# Altium PCB PCB1.PcbDoc
Units mm, origin at the board's own origin, x right, y up, seen from the top; angles counter-clockwise.
Board outline 50 x 30 mm, 2 copper layers (Top Layer, Bottom Layer); 71 components, 46 nets, 205 pads, 0 vias.
Unrouted connection lines stored in the file: 119.
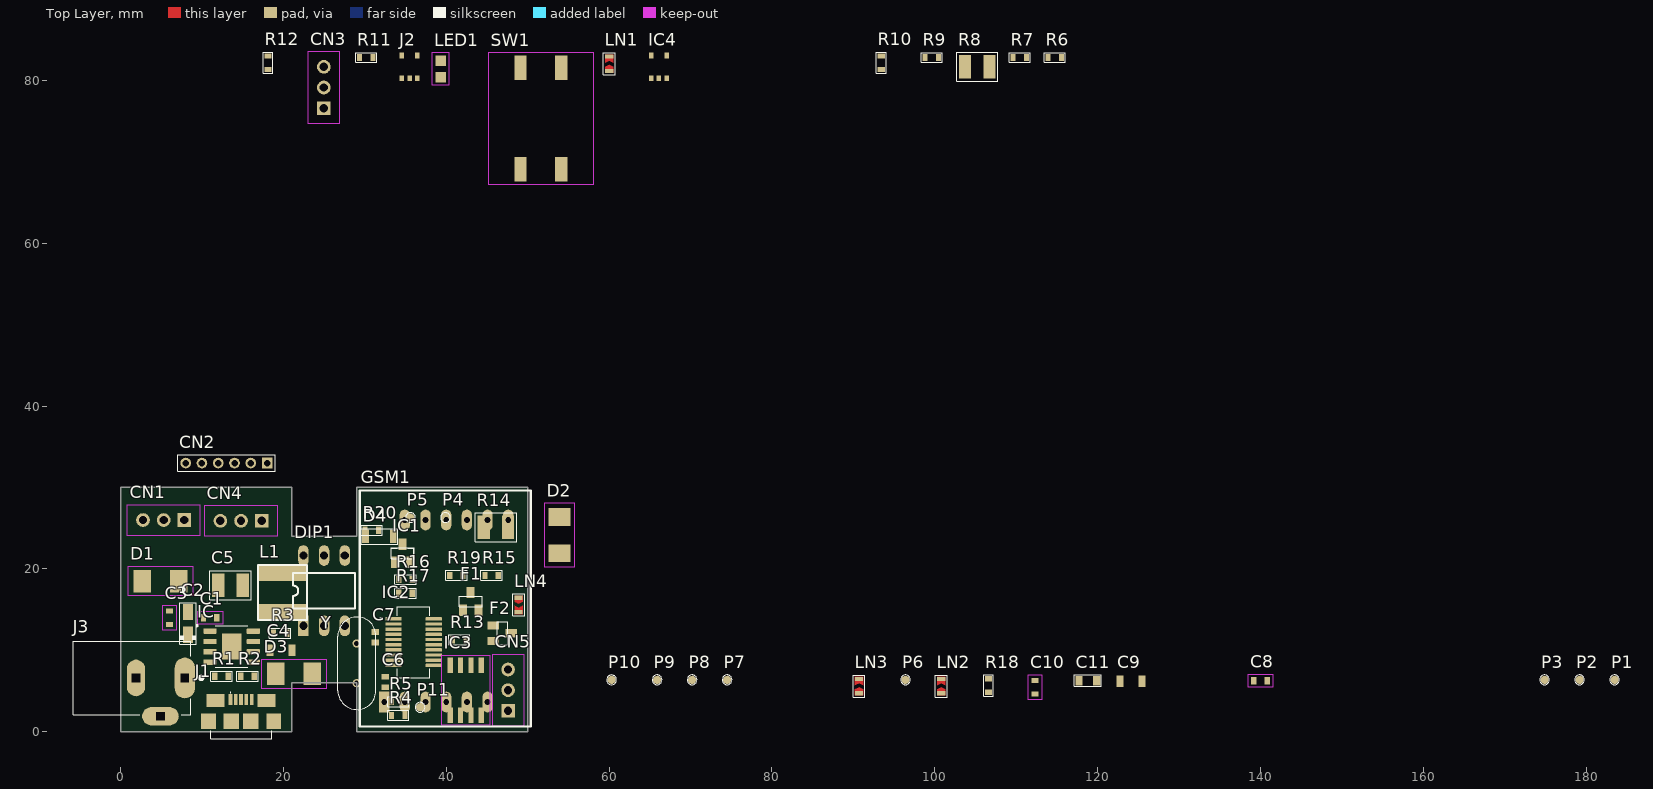
[diagram p0: Top Layer view]
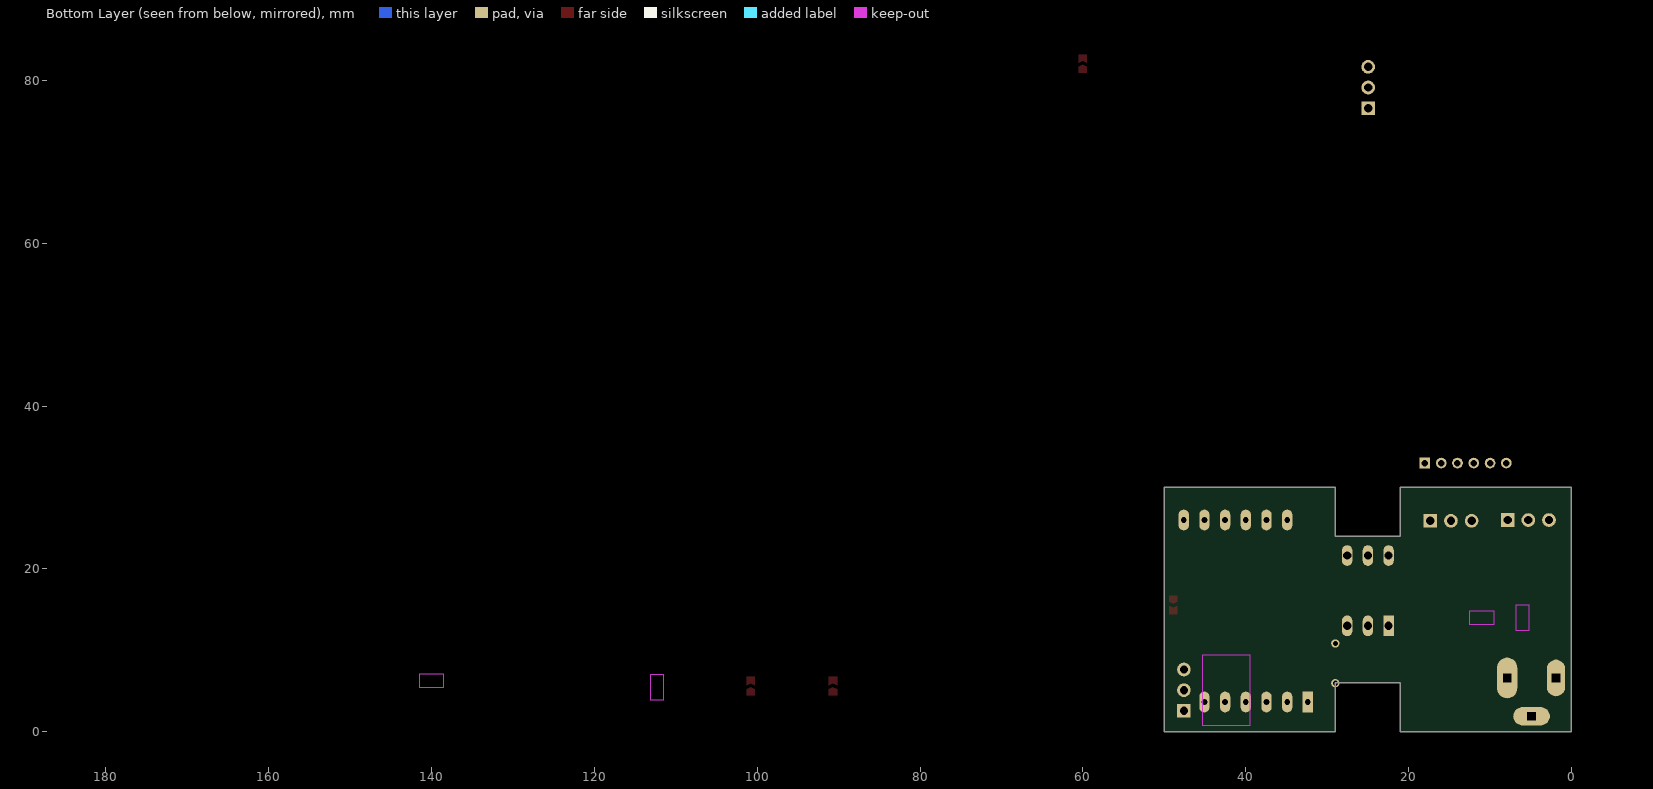
[diagram p1: Bottom Layer view, seen from below]

## Layer stack, top to bottom
Top Solder: solder mask 0.0102, Solder Resist, Dk 3.5
Top Layer: signal copper 0.0356
Dielectric 1: dielectric 0.32, FR-4, Dk 4.8
Bottom Layer: signal copper 0.0356
Bottom Solder: solder mask 0.0102, Solder Resist, Dk 3.5

## Board outline
0,0 21,0 21,6 29,6 29,0 50,0 50,30 29,30 29,24 21,24 21,30 0,30

## Design rules (kind name [scope] priority, off if disabled: settings)
Clearance [All] p1: gap=0.254 ignorepadtopadclearanceinfootprint=FALSE except(0: Arc-Hole Track-Hole SMDPad-Hole THPad-Hole Via-Hole Fill-Hole Poly-Hole Region-Hole Text-Hole)
PolygonConnect [All] p1: connectstyle=Relief reliefconductorwidth=0.254 reliefentries=4 polygonreliefangle="90 Angle" airgapwidth=0.254
RoomDefinition Sheet1 [InComponentClass('Sheet1')] p1: confinementstyle=ConfineIn formatcopy=TRUE lockcomponents=FALSE outline -25.4,-25.4 25.4,-25.4 25.4,0 -25.4,0
RoutingVias [All] p1: holewidth=0.711 width=1.27 viastyle="Through Hole" minholewidth=0.711 minwidth=1.27 maxholewidth=0.711 maxwidth=1.27
SolderMaskExpansion [All] p1: expansion=0.102 istentingtop=FALSE
Width [All] p1: maxlimit=0.254 minlimit=0.254 preferedwidth=0.254
30 further rules are at their usual default settings.

## Components (designator, comment, footprint, x,y, rotation, side; value= is the part's Value field where it differs from the comment)
C1 "Chip Capacitor" C0603 11,14 r180 top
C2 "Tantilum SMD Capacitors" CT3216 8.3,13.3 r90 top
C3 "Chip Capacitor" C0603 6,14 r90 top
C4 "Chip Capacitor" PPS_H 19.7,10 r0 top
C5 "Chip Capacitor" 1210 13.5,18 r180 top
C6 "Chip Capacitor" L0402 32.5,6.1 r270 top
C7 "Chip Capacitor" L0402 31.3,11.6 r90 top
C8 "Chip Capacitor" C0603 140.008,6.274 r0 top
C9 "Chip Capacitor" PPS_H 124.108,6.174 r0 top
C10 "100nF" C0603 112.308,5.474 r90 top
C11 "1uF" C0805 118.808,6.274 r0 top
CN1 "3-WAY_SIL3" SIL_3 5.3,26 r180 top
CN2 "6-WAY_THRU" SIL6_2MM 13,33 r180 top
CN3 "3-WAY_SIL3" SIL_3 24.967,79.124 r90 top
CN4 "3-WAY_SIL3" SIL_3 14.8,25.9 r180 top
CN5 "3-WAY_SIL3" SIL_3 47.6,5.1 r90 top
D1 "Shotky Diode" SMB 4.9,18.5 r0 top
D2 "Shotky Diode" SMB 53.923,24.133 r270 top
D3 "Shotky Diode" SMB 21.3,7.1 r0 top
D4 "General Purpose Diode" SOD80 31.8,24 r0 top
DIP1 "SWITCH_DIP" DIP_SW6 22.46,13 r90 top
F1 "P-Channel MOSFET  -8.0 V, -3.7 A, Single P-Channel, SOT-23" SOT23 43,16 r0 top
F2 "NTR4170N" SOT23 46.9,12.1 r270 top
GSM1 "SIM800 module" SIM800L 32.38,3.648 r90 top
IC "BD9E302EFJ-E2" SOIC127P600X100-9N 13.65,10.451 r0 top
IC1 "ZXCT1107" SOT23 34.642,21.926 r0 top
IC2 "CH340T" SOP63P599X175-20N 36,11 r0 top
IC3 "LM393" SOIC_8 42.4,5.1 r0 top
IC4 "TLV70033" SOT23-5L 66.115,81.664 r0 top
J1 "ZX62-B-5PA(33)" ZX62B5PA33 14.8,2 r0 top
J2 "MCP73831T-2ACI/OT" SOT23-5L 35.508,81.664 r0 top
J3 "PJ-002BH" CUI_PJ-002BH 7.9,6.6 r180 top
L1 "74404064047" 74404064047 19.9,17.1 r90 top
LED1 "LED_ORANGE_SMD" L0805 39.318,81.41 r90 top
LN1 "LINK_SMD" LINK_SMD 60.019,81.918 r0 top
LN2 "LINK_SMD" LINK_SMD 100.808,5.474 r0 top
LN3 "LINK_SMD" LINK_SMD 90.708,5.474 r0 top
LN4 "LINK_SMD" LINK_SMD 48.9,15.7 r180 top
P1 "PIN_SMD_1MM" PAD_SMD_1MM 183.508,6.374 r0 top
P2 "PIN_SMD_1MM" PAD_SMD_1MM 179.208,6.374 r0 top
P3 "PIN_SMD_1MM" PAD_SMD_1MM 174.908,6.374 r0 top
P4 "PIN_SMD_1MM" PAD_SMD_1MM 39.9,26.3 r0 top
P5 "PIN_SMD_1MM" PAD_SMD_1MM 35.6,26.3 r0 top
P6 "PIN_SMD_1MM" PAD_SMD_1MM 96.408,6.374 r0 top
P7 "PIN_SMD_1MM" PAD_SMD_1MM 74.508,6.374 r0 top
P8 "PIN_SMD_1MM" PAD_SMD_1MM 70.208,6.374 r0 top
P9 "PIN_SMD_1MM" PAD_SMD_1MM 65.908,6.374 r0 top
P10 "PIN_SMD_1MM" PAD_SMD_1MM 60.308,6.374 r90 top
P11 "PIN_SMD_1MM" PAD_SMD_1MM 36.8,3 r0 top
R1 "Chip Resistor" R0603 12.4,6.8 r0 top
R2 "Chip Resistor" R0603 15.6,6.8 r180 top
R3 "Chip Resistor" R0603 19.6,12.1 r180 top
R4 "Chip Resistor" R0603 34.1,2 r0 top
R5 "Chip Resistor" R0603 34.1,3.7 r0 top
R6 "Chip Resistor" R0603 114.756,82.807 r0 top
R7 "Chip Resistor" R0603 110.438,82.807 r0 top
R8 "Chip Resistor" R1206 105.231,81.664 r0 top
R9 "Chip Resistor" R0603 99.643,82.807 r0 top
R10 "Chip Resistor" R0603 93.42,82.172 r90 top
R11 "Chip Resistor" R0603 30.174,82.807 r0 top
R12 "Chip Resistor" R0603 18.109,82.172 r90 top
R13 "Chip Resistor" R0603 41.6,11.3 r0 top
R14 "0R27" R1206 46.1,25.1 r0 top
R15 "10K" R0603 45.575,19.2 r0 top
R16 "10K" R0603 35,18.7 r180 top
R17 "100" R0603 35,17 r180 top
R18 "27K" R0603 106.608,5.674 r90 top
R19 "330E" R0603 41.257,19.2 r0 top
R20 "100K" R0603 30.859,24.752 r0 top
SW1 "PUSHBUTTON_NOM" TACTILE_SMD 51.637,75.314 r90 top
Y "ECS-.320-12.5-13X" XTAL_ECS-200-20-1X 29,8.4 r90 top

## Footprints (in the part's own frame and the unit in brackets; to place one, negate y for a bottom-side part, rotate by r counter-clockwise, add the part's x,y. Pads: shape width x height; smd on the part's side, far side on the other; paste and mask are expansions set on the pad)
1210 [mm]
  rect 1.5x2.9 smd: 1(-1.5,0) 2(1.5,0)
  silkscreen extent -2.54,-1.78 2.54,1.78
74404064047 [mil]
  rect 72x228 smd: 1(-92,0) 2(92,0)
  silkscreen extent -134,-118 134,118, body extent -98,-98 98,98, height 119
C0603 [mil]
  rect 25x35 smd: 1(-32.5,0) 2(32.5,0)
  Keep-Out Layer region: -60,-32 -60,32 60,32 60,-32
  body extent -31,-17 31,18, height 31
C0805 [mil]
  rect 35x45 smd: 1(-42.5,0) 2(42.5,0)
  silkscreen extent -65,-28 65,28, body extent -39,-25 39,25, height 24
CT3216 [mm]
  rect 2x1.2 smd: 1(-1.4,0) 2(1.4,0)
  silkscreen extent -2.54,-1.02 2.54,1.02
CUI_PJ-002BH [mm]
  oval 2.5x5 hole 1 square: 1(0,0)
  oval 2.25x4.5 hole 1 square: 2(6,0)
  oval 4.5x2.25 hole 1 square: 3(3,4.7)
  silkscreen extent -2.2,-4.5 13.7,4.5, body extent -0.8,-4.5 13.6,4.9, height 11.01
DIP_SW6 [mil]
  rect 100x50 hole 40: 1(0,0)
  oval 100x50 hole 40: 2(0,-100) 3(0,-200) 4(340,-200) 5(340,-100) 6(340,0)
  silkscreen extent 85,-250 255,50
L0402 [mm]
  rect 0.7x0.9 smd: 1(-0.65,0) 2(0.65,0)
L0805 [mil]
  rect 50x50 smd: A(40,0) C(-40,0)
  Top Layer keep-out region: -80,-40 -80,40 80,40 80,-40
LINK_SMD [mm]
  rect 1x0.5 smd paste+0 mask+0: 1(0,1) 2(0,-0.75)
  Top Layer region: -0.5,-0.25 0,0 0.5,-0.25 0.5,-1 -0.5,-1 -0.5,-0.25
  Top Layer region: -0.5,0.25 0,0.5 0.5,0.25 0.5,1.25 -0.5,1.25 -0.5,0.25
  silkscreen extent -0.72,-1.23 0.72,1.48
PAD_SMD_1MM [mm]
  rrect100% 1x1 smd: 1(0,0)
  silkscreen extent -0.6,-0.6 0.6,0.6
PPS_H [mm]
  rect 0.9x1.4 smd: 1(-1.35,0) 2(1.35,0)
R0603 [mil]
  rect 25x35 smd: 1(-32.5,0) 2(32.5,0)
  silkscreen extent -51,-24 51,24, body extent -31,-16 31,16, height 18
R1206 [mm]
  rect 1.5x2.9 smd: 1(-1.5,0) 2(1.5,0)
  silkscreen extent -2.54,-1.78 2.54,1.78
SIL6_2MM [mil]
  rect 51.5x51.5 / inner round 47.58 / far side rect 51.5x51.5 hole 31.5: 1(-196.85,0)
  round 51.5 hole 31.5: 2(-118.11,0) 3(-39.37,0) 4(39.37,0) 5(118.11,0) 6(196.85,0)
  silkscreen extent -236,-39 236,39
SIL_3 [mil]
  rect 66x66 / inner round 60.98 / far side rect 66x66 hole 40: 1(-100,0)
  round 66 hole 40: 2(0,0) 3(100,0)
  Top Layer keep-out region: -175,-75 -175,75 175,75 175,-75
SIM800L [mil]
  rect 100x50 hole 28: 1(0,0)
  oval 100x50 hole 28: 2(0,-100) 3(0,-200) 4(0,-300) 5(0,-400) 6(0,-500) 7(880,-600) 8(880,-500) 9(880,-400) 10(880,-300) 11(880,-200) 12(880,-100)
  silkscreen extent -118,-709 1024,118
SMB [mil]
  rect 85x108 smd: A(-88,0) C(88,0)
  Top Layer keep-out region: -156,-72 -156,72 156,72 156,-72
  body extent -105,-71 105,71, height 105
SOD80 [mil]
  rect 32x66 smd: 1(67.5,0) 2(-67.5,0)
  silkscreen extent -88,-38 88,38, body extent -67,-33 69,26, height 60
SOIC127P600X100-9N [mm]
  rrect25% 1.61x0.66 smd: 1(-2.655,1.905) 2(-2.655,0.635) 3(-2.655,-0.635) 4(-2.655,-1.905) 5(2.655,-1.905) 6(2.655,-0.635) 7(2.655,0.635) 8(2.655,1.905)
  rect 2.4x3.2 smd paste-3: 9(0,0)
  silkscreen extent -4.36,-2.56 2,2.66, body extent -3,-2.45 3,2.45, height 1.03
SOIC_8 [mil]
  rect 25x75 smd: 1(-75,-120) 2(-25,-120) 3(25,-120) 4(75,-120) 5(75,120) 6(25,120) 7(-25,120) 8(-75,120)
  Keep-Out Layer region: -115,-170 -115,170 115,170 115,-170
  body extent -96,-118 96,118, height 70
SOP63P599X175-20N [mm]
  rrect10% 1.97x0.41 smd: 1(-2.47,2.857) 2(-2.47,2.222) 3(-2.47,1.587) 4(-2.47,0.953) 5(-2.47,0.318) 6(-2.47,-0.318) 7(-2.47,-0.953) 8(-2.47,-1.587) 9(-2.47,-2.222) 10(-2.47,-2.857) 11(2.47,-2.857) 12(2.47,-2.222) 13(2.47,-1.587) 14(2.47,-0.953) 15(2.47,-0.318) 16(2.47,0.318) 17(2.47,0.953) 18(2.47,1.587) 19(2.47,2.222) 20(2.47,2.857)
  silkscreen extent -4.1,-4.37 1.99,4.37, body extent -3,-4.33 3,4.33, height 1.75
SOT23 [mm]
  rect 1x1.4 smd: 1(-0.95,-1.1) 2(0.95,-1.1) 3(0,1.1)
  silkscreen extent -1.42,-0.66 1.42,0.66, body extent -1.45,-1.25 1.45,1.25, height 1.01
SOT23-5L [mm]
  rect 0.55x0.7 smd: 1(-0.95,-1.4) 2(0,-1.4) 3(0.95,-1.4) 4(0.95,1.4) 5(-0.95,1.4)
  body extent -1.45,-1.35 1.45,1.35, height 1.45
TACTILE_SMD [mm]
  rect 3x1.5 smd: 1(-6.23,2.5) 2(6.23,2.5) 3(-6.23,-2.5) 4(6.23,-2.5)
  Top Layer keep-out region: -8.128,-6.401 -8.128,6.401 8.128,6.401 8.128,-6.401
XTAL_ECS-200-20-1X [mm]
  round 1.03 hole 0.63: 1(-2.44,0) 2(2.44,0)
  silkscreen extent -5.68,-2.33 5.68,2.33, body extent -5.88,-2.5 5.47,2.5, height 13.47
ZX62B5PA33 [mm]
  rect 0.45x1.38 smd: 1(-1.3,1.95) 2(-0.65,1.95) 3(0,1.95) 4(0.65,1.95) 5(1.3,1.95)
  rect 2.2x1.6 smd: 6(-3.15,1.825) 7(3.15,1.825)
  rect 1.8x1.9 smd: 8(-4,-0.725) 11(4,-0.725)
  rect 1.9x1.9 smd: 9(-1.2,-0.725) 10(1.2,-0.725)
  silkscreen extent -3.75,-2.88 3.75,2.87, body extent -4.04,-3.2 4.04,2.4, height 2.78

## Part data
C1 C3 C8: library part CHIP-CAP_100NF, Package=C0603, DeviceName=_100NF, DeviceSetName=CHIP-CAP, GateName_1=G$1, LibraryName=Cellstop_Parts, SymbolName_1=NO_POLARITY
C2: library part TANT-CAP_10UF, Package=CT3216, DeviceName=_10UF, DeviceSetName=TANT-CAP, GateName_1=G$1, LibraryName=Cellstop_Parts, SymbolName_1=WITH_POLARITY
C4 C9: library part CHIP-CAP_10NF, Package=PPS_H, DeviceName=_10NF, DeviceSetName=CHIP-CAP, GateName_1=G$1, LibraryName=Cellstop_Parts, SymbolName_1=NO_POLARITY
C5: library part CHIP-CAP_4.7UF, Package=1210, DeviceName=_4.7UF, DeviceSetName=CHIP-CAP, GateName_1=G$1, LibraryName=Cellstop_Parts, SymbolName_1=NO_POLARITY
C6 C7: library part CHIP-CAP_1.5P, Package=L0402, DeviceName=_1.5P, DeviceSetName=CHIP-CAP, GateName_1=G$1, LibraryName=Cellstop_Parts, SymbolName_1=NO_POLARITY
C10: library part CHIP-CAP_100NF, "Chip Capacitor", DeviceName=_100NF, DeviceSetName=CHIP-CAP, GateName_1=G$1, LibraryName=Cellstop_Parts, SymbolName_1=NO_POLARITY
C11: library part CHIP-CAP_1UF, "Chip Capacitor", DeviceName=_1UF, DeviceSetName=CHIP-CAP, GateName_1=G$1, LibraryName=Cellstop_Parts, SymbolName_1=NO_POLARITY
CN1 CN3 CN4 CN5: Package=SIL_3, DeviceName=_SIL3, DeviceSetName=3-WAY, GateName_1=G$1, LibraryName=Cellstop_Parts, SymbolName_1=CON_3_WAY
CN2: Package=SIL6_2MM, DeviceName=_THRU, DeviceSetName=6-WAY, GateName_1=G$1, LibraryName=Cellstop_Parts, SymbolName_1=CON_6_WAY
D1 D2 D3: library part DIODE-SHOTKY_SS24, Package=SMB, DeviceName=_SS24, DeviceSetName=DIODE-SHOTKY, GateName_1=G$1, LibraryName=Cellstop_Parts, SymbolName_1=SHOTKY
D4: library part DIODE_LL4148, Package=SOD80, DeviceName=_LL4148, DeviceSetName=DIODE, GateName_1=G$1, LibraryName=Cellstop_Parts, SymbolName_1=DIODE
F1: library part MOSFET_NTR2101P, Package=SOT23, DeviceName=_NTR2101P, DeviceSetName=MOSFET, GateName_1=G$1, LibraryName=Cellstop_Parts, SymbolName_1=P-CHAN-3PIN
GSM1: library part SIM800_Module
IC3: Package=SOIC_8, DeviceSetName=LM393, GateName_1=G$1, LibraryName=Cellstop_Parts, SymbolName_1=LM393
IC4: Package=SOT23-5L, DeviceSetName=TLV70033, GateName_1=G$1, LibraryName=Cellstop_Parts, SymbolName_1=TLV70033
J1: "USB - micro B USB 2.0 Receptacle Connector 5 Position Surface Mount, Right Angle", Package=None, Check_prices=https://www.snapeda.com/parts/ZX62-B-5PA(33)/Hirose/view-part/?ref=eda, MF="Hirose Electric Co Ltd", MP=ZX62-B-5PA(33), SnapEDA_Link=https://www.snapeda.com/parts/ZX62-B-5PA(33)/Hirose/view-part/?ref=snap
J2: "Charger IC Lithium Ion/Polymer SOT-23-5", Package="SOT-23 Microchip", Availability="In Stock", Check_prices=https://www.snapeda.com/parts/MCP73831T-2ACI/OT/Microchip/view-part/?ref=eda, MF=Microchip, MP=MCP73831T-2ACI/OT, Price=None, Purchase-URL=https://pricing.snapeda.com/search/part/MCP73831T-2ACI/OT/?ref=eda, SnapEDA_Link=https://www.snapeda.com/parts/MCP73831T-2ACI/OT/Microchip/view-part/?ref=snap
J3: "2.5 x 6.5 mm, 5.0 A, Horizontal, Through Hole, Dc Power Jack Connector", Package=None, Check_prices=https://www.snapeda.com/parts/PJ-002BH/CUI+Devices/view-part/?ref=eda, CUI_purchase_URL=https://www.cuidevices.com/product/interconnect/connectors/dc-power-connectors/jacks/pj-002bh?utm_source=snapeda.com&utm_medium=referral&utm_campaign=snapedaBOM, MF="CUI Devices", MP=PJ-002BH, SnapEDA_Link=https://www.snapeda.com/parts/PJ-002BH/CUI+Devices/view-part/?ref=snap
LED1: Package=L0805, DeviceName=_ORANGE_SMD, DeviceSetName=LED, GateName_1=G$1, LibraryName=Cellstop_Parts, SymbolName_1=LED
P1 P2 P3 P4 P5 P6 P7 P8 P9 P10 P11: Package=PAD_SMD_1MM, DeviceName=_SMD_1MM, DeviceSetName=PIN, GateName_1=G$1, LibraryName=Cellstop_Parts, SymbolName_1=PIN
R1 R3 R12: library part CHIP-RESISTOR_10K, Package=R0603, DeviceName=_10K, DeviceSetName=CHIP-RESISTOR, GateName_1=G$1, LibraryName=Cellstop_Parts, SymbolName_1=RESISTOR
R2 R6 R7 R9 R10 R11 R13: library part CHIP-RESISTOR_1K, Package=R0603, DeviceName=_1K, DeviceSetName=CHIP-RESISTOR, GateName_1=G$1, LibraryName=Cellstop_Parts, SymbolName_1=RESISTOR
R4 R5: library part CHIP-RESISTOR_10E, Package=R0603, DeviceName=_10E, DeviceSetName=CHIP-RESISTOR, GateName_1=G$1, LibraryName=Cellstop_Parts, SymbolName_1=RESISTOR
R8: library part CHIP-RESISTOR_1206_0R27, Package=R1206, DeviceName=_1206_0R27, DeviceSetName=CHIP-RESISTOR, GateName_1=G$1, LibraryName=Cellstop_Parts, SymbolName_1=RESISTOR
R14: library part CHIP-RESISTOR_1206_0R27, "Chip Resistor", DeviceName=_1206_0R27, DeviceSetName=CHIP-RESISTOR, GateName_1=G$1, LibraryName=Cellstop_Parts, SymbolName_1=RESISTOR
R15: library part CHIP-RESISTOR_10K, "Chip Resistor", CELLSTOPCODE=CELLSTOPCODE, DeviceName=_10K, DeviceSetName=CHIP-RESISTOR, GateName_1=G$1, LibraryName=resistors, LOCATION=LOCATION, SUPPLIER="Arrow Altech", SUPPLIERCODE=SUPPLIERCODE, SymbolName_1=RESISTOR
R16 R17: library part CHIP-RESISTOR_1K, "Chip Resistor", DeviceName=_1K, DeviceSetName=CHIP-RESISTOR, GateName_1=G$1, LibraryName=Cellstop_Parts, SymbolName_1=RESISTOR
R18 R20: library part CHIP-RESISTOR_100K, "Chip Resistor", DeviceName=_100K, DeviceSetName=CHIP-RESISTOR, GateName_1=G$1, SymbolName_1=RESISTOR
  R18: LibraryName=Cellstop_Parts
  R20: CELLSTOPCODE=CELLSTOPCODE, LibraryName=resistors, LOCATION=LOCATION, SUPPLIER="Arrow Altech", SUPPLIERCODE=SUPPLIERCODE
R19: library part CHIP-RESISTOR_330E, "Chip Resistor", CELLSTOPCODE=CELLSTOPCODE, DeviceName=_330E, DeviceSetName=CHIP-RESISTOR, GateName_1=G$1, LibraryName=resistors, LOCATION=LOCATION, SUPPLIER="Arrow Altech", SUPPLIERCODE=SUPPLIERCODE, SymbolName_1=RESISTOR
SW1: Package=TACTILE_SMD, DeviceName=M, DeviceSetName=PUSHBUTTON_NO, GateName_1=G$1, LibraryName=Cellstop_Parts, SymbolName_1=SWITCH_NO_PUSH
Y: "32kHz Â±30ppm Crystal 12.5pF Cylindrical Can, Radial", Package="Cylindrical Can Radial  ECS International", Availability=Unavailable, MF="ECS Inc.", MP=ECS-.320-12.5-13X, Price=None, SnapEDA_Link=https://www.snapeda.com/parts/ECS-.320-12.5-13X/ECS%20Inc./view-part/561753/?ref=snap
F2: CELLSTOPCODE=CELLSTOPCODE, DeviceName=N, DeviceSetName=NTR4170, GateName_1=G$1, LibraryName=fets, LOCATION=LOCATION, SUPPLIER="Arrow Altech", SUPPLIERCODE=SUPPLIERCODE, SymbolName_1=N-CHAN-3PIN
IC1: DeviceSetName=ZXCT1107, GateName_1=G$1, LibraryName=Cellstop_Parts, SymbolName_1=ZXCT1107
LN1 LN2 LN3 LN4: DeviceName=_SMD, DeviceSetName=LINK, GateName_1=G$1, LibraryName=Cellstop_Parts, Package=LINK_SMD, SymbolName_1=LINK

## Nets (pads, with @x,y where several pads share a name; then routed paths per layer and width w, separated by ;. In a path a pad name is that pad's centre, name@x,y a point inside that pad or via, vN(x,y) a via of type N, cw(c..) or ccw(c..) an arc to the next point about the centre after c; other vN are vias at no path point)
3V3: CN2.1 DIP1.1 IC3.8 IC4.5 P8.1
4.5v: C8.1 D2.C D3.C F1.2 IC4.1 IC4.3 J2.4 LED1.A LN1.2 P4.1 P7.1 R15.2
BOOT0: CN2.2 DIP1.6
CH340_RX: CN2.4 GSM1.5 IC2.4
CH340_TX: CN2.3 GSM1.4 IC2.3
CURRENT_LIMIT: IC3.3 LN4.1
FB: CN1.2 CN4.2 D4.2 IC.5 R1.1 R2.2
GND: C2.2 C3.2 C5.2 C6.2 C7.2 C8.2 C9.2 C10.2 C11.2 CN1.3 CN2.6 CN3.3 CN5.3 F2.2 GSM1.6 IC3.4 IC4.2 IC.4 IC.7 J1.5 J1.6 J1.7 J1.8 J1.9 J1.10 J1.11 J2.2 J3.2 R2.1 R3.1 R10.1 R12.1 R18.1 R20.1 SW1.1
GSM_PWR: F1.3 GSM1.2 P2.1
NetC1_1: C1.1 IC.8 L1.1
NetC1_2: C1.2 IC.1
NetC2_1: C2.1 C3.1 D1.C IC.2 P3.1
NetC4_1: C4.1 IC.6
NetC4_2: C4.2 R3.2
NetC5_1: C5.1 CN4.1 D2.A L1.2 R1.2
NetC6_1: C6.1 IC2.10 Y.1
NetC7_1: C7.1 IC2.9 Y.2
NetC9_1: C9.1 IC2.5
NetC10_1: C10.1 C11.1 R16.2
NetCN3_1: CN3.1 J2.3 LN1.1
NetCN5_2: CN5.2 IC3.2
NetD1_A: D1.A J3.1
NetD3_A: D3.A J1.1
NetD4_1: D4.1 IC3.1
NetF1_1: F1.1 R15.1 R19.2
NetF2_1: F2.1 R13.2 R20.2
NetF2_3: F2.3 R19.1
NetIC1_2: IC1.2 P5.1 R14.1
NetIC1_3: IC1.3 R17.1
NetIC2_15: IC2.15 LN2.2
NetIC2_16: IC2.16 LN2.1 P6.1 R13.1
NetIC3_5: IC3.5 R6.2 R10.2
NetIC3_6: IC3.6 R7.2 R9.1
NetIC3_7: IC3.7 LN4.2 R9.2
NetJ1_2: J1.2 R4.1
NetJ1_3: J1.3 R5.2
NetJ2_1: J2.1 R11.1
NetJ2_5: J2.5 R12.2
NetLED1_C: LED1.C R11.2
NetP9_1: P9.1 R6.1
NetP10_1: P10.1 R7.1
NetR16_1: R16.1 R17.2 R18.2
RESET: CN2.5 SW1.3
USBD+: IC2.6 R5.1
USBD-: IC2.7 R4.2
vbatt: IC1.1 P1.1 R14.2
pads on no net: CN1.1 CN3.2 CN4.3 CN5.1 DIP1.2 DIP1.3 DIP1.4 DIP1.5 GSM1.1 GSM1.3 GSM1.7 GSM1.8 GSM1.9 GSM1.10 GSM1.11 GSM1.12 IC2.1 IC2.2 IC2.8 IC2.11 IC2.12 IC2.13 IC2.14 IC2.17 IC2.18 IC2.19 IC2.20 IC4.4 IC.3 IC.9 J1.4 J3.3 LN3.1 LN3.2 P11.1 R8.1 R8.2 SW1.2 SW1.4

## Text inside footprints (layer, text, board x,y; h text height)
IC3: Mechanical 7 "1" at 40.749,3.576 h0.63 r90; Mechanical 7 "4" at 44.559,3.576 h0.63 r90; Mechanical 7 "5" at 44.559,6.37 h0.63 r90; Mechanical 7 "8" at 40.749,6.37 h0.63 r90